# EAGLE board Lamp Logic Board_22 Power (EAGLE 9.5.1)
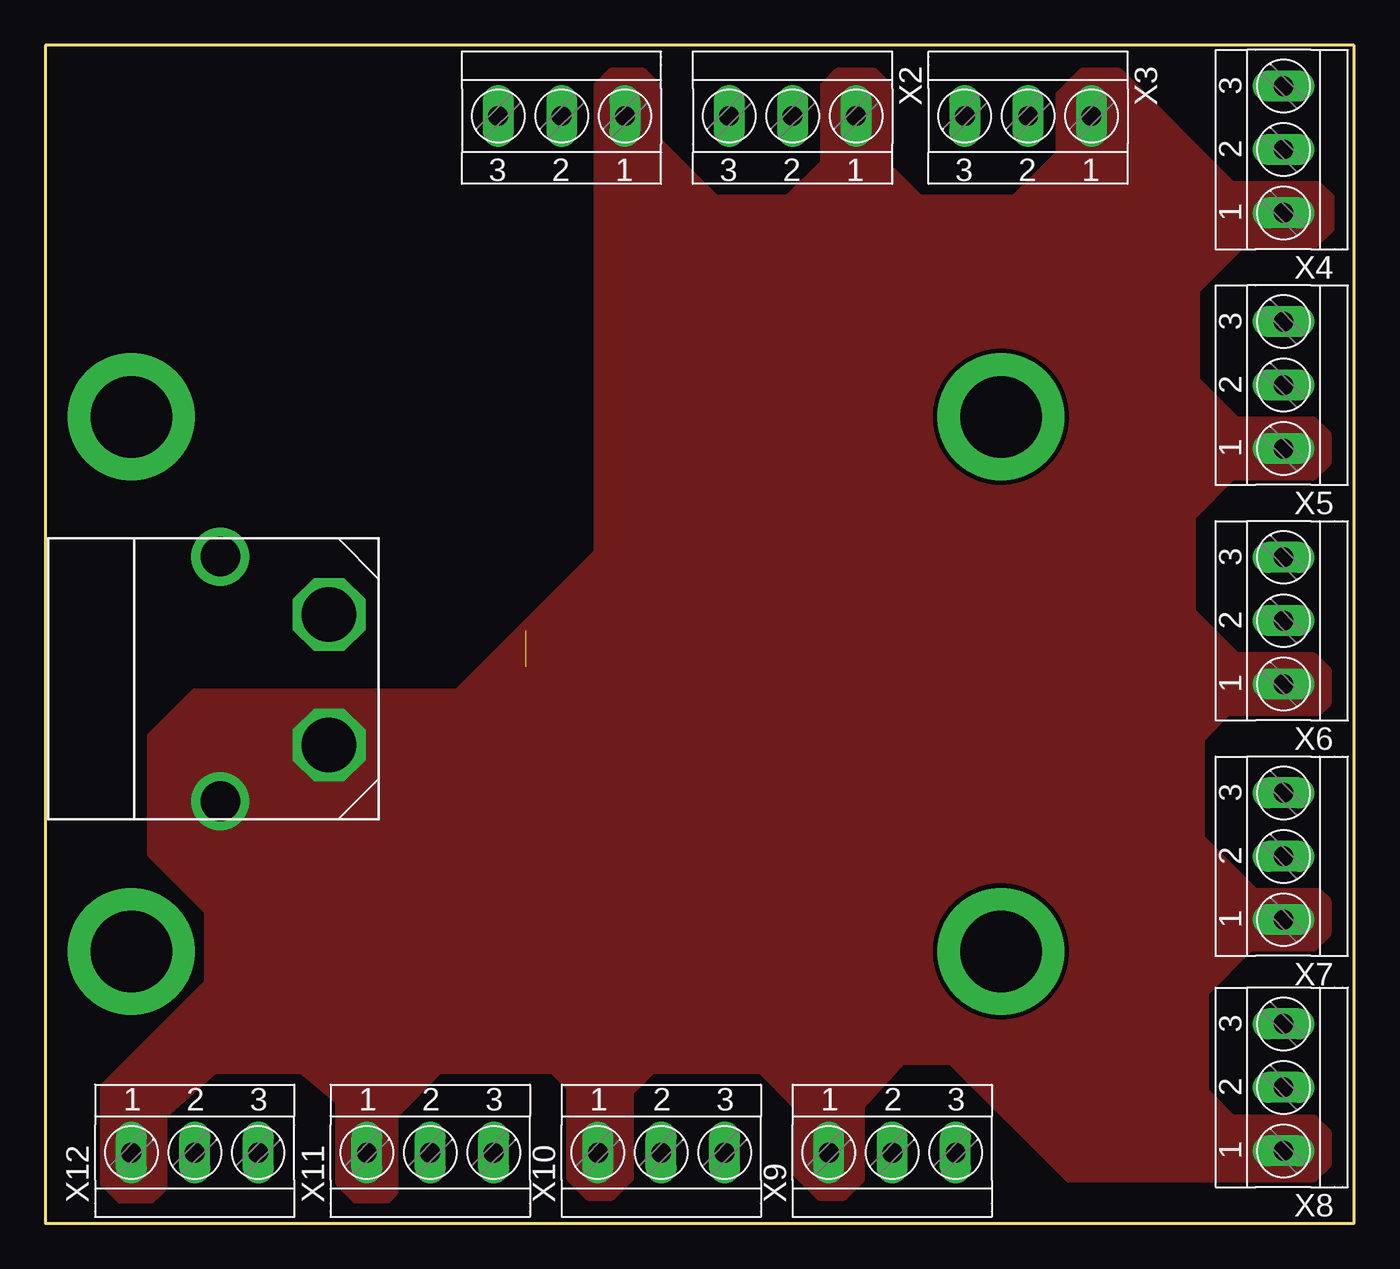
[diagram p0: board, top side]
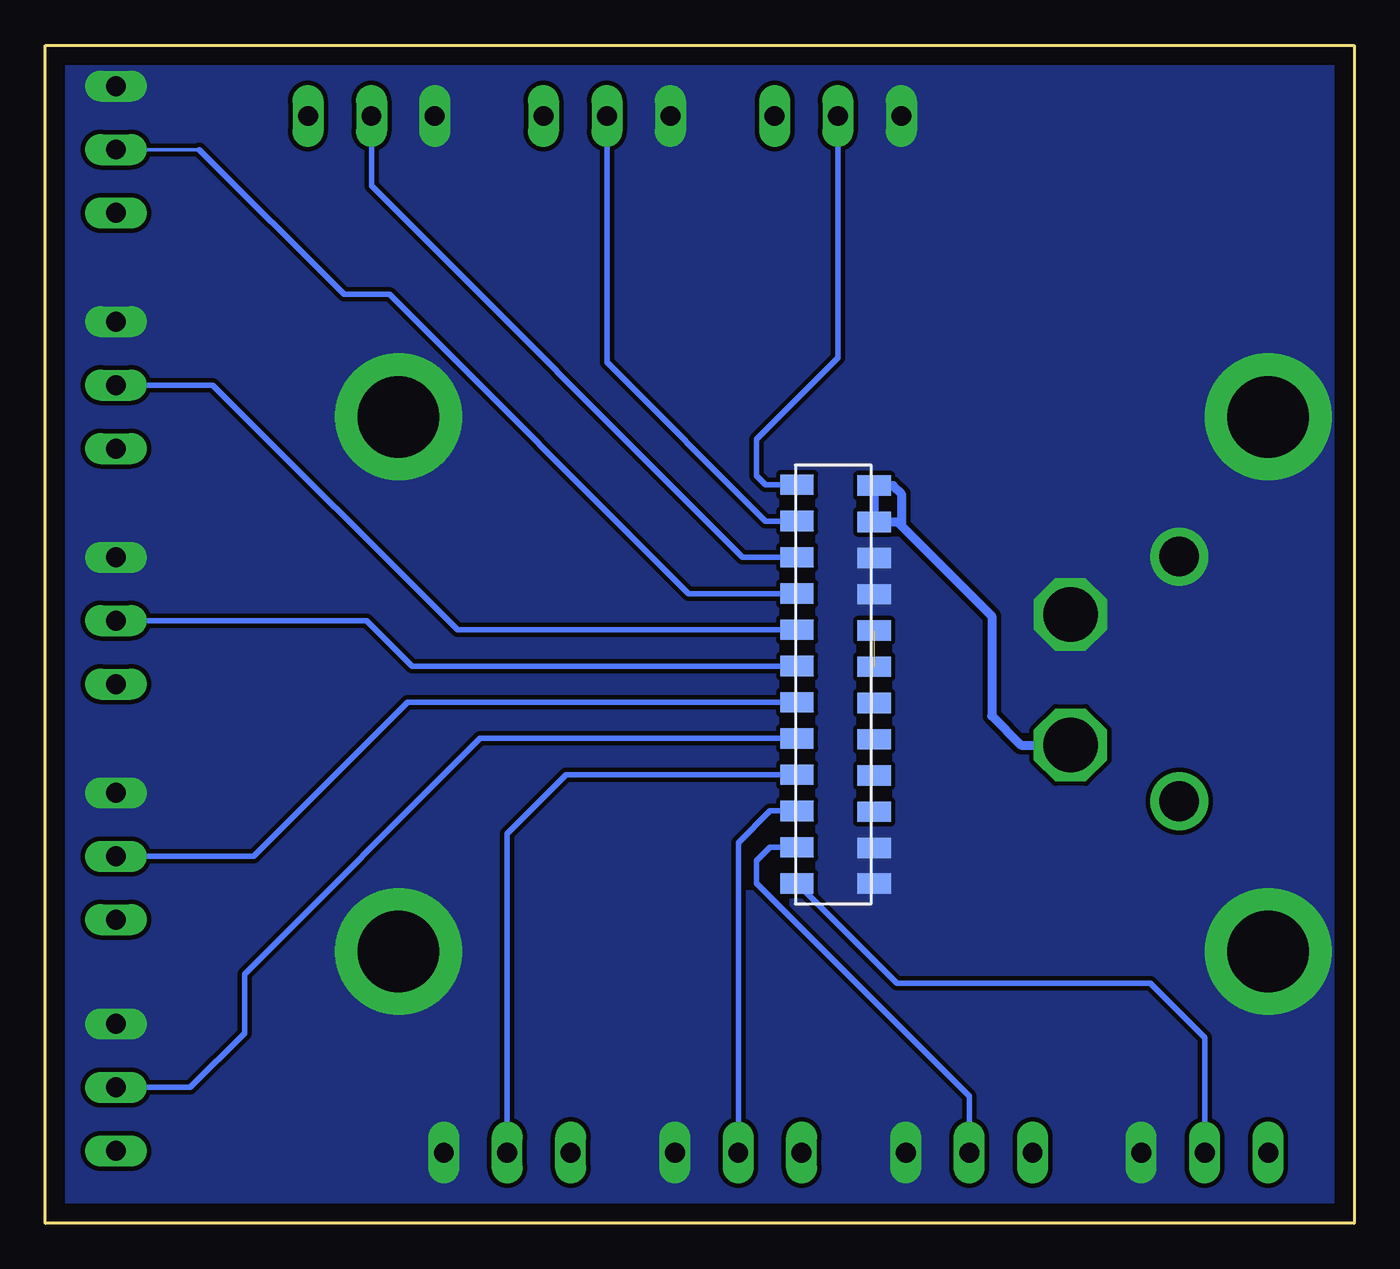
[diagram p1: board, bottom side, seen from below]

Size 72.25 x 65 mm. Coordinates in mm from the lower left corner, seen from the top.
Outline: 72.25,0 72.25,65 0,65 0,0 72.25,0
Copper layers (1*16): Top 0.035mm / dielectric 1.5mm / Bottom 0.035mm
Design rules "default": minimum track width 6mil, minimum drill 0.35mm, track to track 6mil, track to pad 6mil, pad to pad 6mil, via to via 6mil, smd to smd 6mil, copper to edge 40mil, drill to drill 6mil, minimum pad ring 10mil, minimum via ring 8mil, stop-mask expansion 4mil, vias tented up to drill 0mil, thermal gap 10mil

## Footprints (pad centres in the part's own frame; a part is rotated, then mirrored left to right if it is on the bottom)
4,PIECE = drill 4.5 pad 7: P$1 0,0; P$2 48,29.5; P$3 0,29.5; P$4 48,0
MY_HEADER = smd 1.12 x 1.83: P$1 -2,0; P$2 0.005,0; P$3 2.005,0; P$4 4.005,0; P$5 6.005,0; P$6 8.005,0; P$7 10.005,0; P$8 12.005,0; P$9 14.005,0; P$10 16.005,0; P$11 18.005,0; P$12 20.005,0; P$13 -2,-4.25; P$14 -0.045,-4.25; P$15 1.955,-4.25; P$16 3.955,-4.25; P$17 5.955,-4.25; P$18 7.955,-4.25; P$19 9.955,-4.25; P$20 11.955,-4.25; P$21 13.955,-4.25; P$22 15.955,-4.25; P$23 17.955,-4.25; P$24 19.955,-4.25
XT60 = drill 3 octagon: + 4.1,2.75; - 11.3,2.75 | drill 2.184 pad 2.438: +_HOLE 1,8.75 | drill 2.184 pad 2.413: -_HOLE 14.5,8.75
TERMINAL-BLOCK-3-PIN-3.5MM-LONG-PAD = drill 1.1 pad 1.7 long: 1 -3.5,-0.1; 2 0,-0.1; 3 3.5,-0.1

## Placement (x,y rotation side)
U$1  POWERBOARD_TEMPLATEPOWERBOARD_TEMPLATE  [4,PIECE]  4.75,15 0 top
U$2  MY_HEADER  [MY_HEADER]  30.75,20.75 90 bottom
U$3  XT60  [XT60]  18.41,22.29 90 top
X1  TERMINAL-BLOCK-3.5MM-3-PIN-LONG-PAD  [TERMINAL-BLOCK-3-PIN-3.5MM-LONG-PAD]  28.5,61 180 top
X2  TERMINAL-BLOCK-3.5MM-3-PIN-LONG-PAD  [TERMINAL-BLOCK-3-PIN-3.5MM-LONG-PAD]  41.25,61 180 top
X3  TERMINAL-BLOCK-3.5MM-3-PIN-LONG-PAD  [TERMINAL-BLOCK-3-PIN-3.5MM-LONG-PAD]  54.25,61 180 top
X4  TERMINAL-BLOCK-3.5MM-3-PIN-LONG-PAD  [TERMINAL-BLOCK-3-PIN-3.5MM-LONG-PAD]  68.25,59.25 90 top
X5  TERMINAL-BLOCK-3.5MM-3-PIN-LONG-PAD  [TERMINAL-BLOCK-3-PIN-3.5MM-LONG-PAD]  68.25,46.25 90 top
X6  TERMINAL-BLOCK-3.5MM-3-PIN-LONG-PAD  [TERMINAL-BLOCK-3-PIN-3.5MM-LONG-PAD]  68.25,33.25 90 top
X7  TERMINAL-BLOCK-3.5MM-3-PIN-LONG-PAD  [TERMINAL-BLOCK-3-PIN-3.5MM-LONG-PAD]  68.25,20.25 90 top
X8  TERMINAL-BLOCK-3.5MM-3-PIN-LONG-PAD  [TERMINAL-BLOCK-3-PIN-3.5MM-LONG-PAD]  68.25,7.5 90 top
X9  TERMINAL-BLOCK-3.5MM-3-PIN-LONG-PAD  [TERMINAL-BLOCK-3-PIN-3.5MM-LONG-PAD]  46.75,4 0 top
X10  TERMINAL-BLOCK-3.5MM-3-PIN-LONG-PAD  [TERMINAL-BLOCK-3-PIN-3.5MM-LONG-PAD]  34,4 0 top
X11  TERMINAL-BLOCK-3.5MM-3-PIN-LONG-PAD  [TERMINAL-BLOCK-3-PIN-3.5MM-LONG-PAD]  21.25,4 0 top
X12  TERMINAL-BLOCK-3.5MM-3-PIN-LONG-PAD  [TERMINAL-BLOCK-3-PIN-3.5MM-LONG-PAD]  8.25,4 0 top

## Library data of the parts
U$1 = QUICKFIT_RISER_THING
U$2 = MY_HEADER
U$3 = XT60
X1-X12 = Rembrandt Electronics - Terminal Block 3-5mm v1-0

## Nets
GND: U$1.P$1 U$1.P$2 U$1.P$3 U$1.P$4 U$2.P$13 U$2.P$14 U$2.P$21 U$2.P$22 U$3.- U$3.-_HOLE X1.3 X2.3 X3.3 X4.3 X5.3 X6.3 X7.3 X8.3 X9.3 X10.3 X11.3 X12.3
HEADER_CS: U$2.P$15
LEDS1_5V: U$2.P$12 X1.2
LEDS2_5V: U$2.P$11 X2.2
LEDS3_5V: U$2.P$10 X3.2
LEDS4_5V: U$2.P$9 X4.2
LEDS5_5V: U$2.P$8 X5.2
LEDS6_5V: U$2.P$7 X6.2
LEDS7_5V: U$2.P$6 X7.2
LEDS8_5V: U$2.P$5 X8.2
LEDS9_5V: U$2.P$4 X9.2
LEDS10_5V: U$2.P$3 X10.2
LEDS11_5V: U$2.P$2 X11.2
LEDS12_5V: U$2.P$1 X12.2
MISO: U$2.P$18
MOSI: U$2.P$17
SCK: U$2.P$16
VDD3V3: U$2.P$19 U$2.P$20
VDD5V: U$2.P$23 U$2.P$24 U$3.+ U$3.+_HOLE X1.1 X2.1 X3.1 X4.1 X5.1 X6.1 X7.1 X8.1 X9.1 X10.1 X11.1 X12.1

## Tracks (layer width: path | path; a pad name or v marks a point on that pad's centre or on a via)
GND
  pour Bottom (isolate 0.254, no thermals): -1,65.25 -1,-0.25 -1.25,-0.5 73,-0.5 73,65.5 -0.75,65.5
LEDS1_5V
  Bottom 0.203: U$2.P$12
  Bottom 0.305: X1.2 28.5,47.75 33,43.25 33,41.25 32.5,40.75 U$2.P$12
LEDS2_5V
  Bottom 0.203: U$2.P$11
  Bottom 0.305: X2.2 41.25,47.5 32.5,38.75 U$2.P$11
LEDS3_5V
  Bottom 0.305: X3.2 54.25,57.25 33.75,36.75 U$2.P$10
LEDS4_5V
  Bottom 0.203: X4.2 63.75,59.25 | U$2.P$9
  Bottom 0.305: U$2.P$9 36.75,34.75 53.25,51.25 55.75,51.25 63.75,59.25
LEDS5_5V
  Bottom 0.203: U$2.P$8
  Bottom 0.305: U$2.P$8 49.5,32.75 63,46.25 X5.2
LEDS6_5V
  Bottom 0.203: U$2.P$7
  Bottom 0.305: X6.2 54.5,33.25 52,30.75 U$2.P$7
LEDS7_5V
  Bottom 0.305: X7.2 60.75,20.25 52.24,28.76 U$2.P$6
LEDS8_5V
  Bottom 0.305: X8.2 64.25,7.5 61.25,10.5 61.25,13.75 48.24,26.76 U$2.P$5
LEDS9_5V
  Bottom 0.305: X9.2 46.75,21.5 43.49,24.76 U$2.P$4
LEDS10_5V
  Bottom 0.305: X10.2 34,21 32.25,22.75 U$2.P$3
LEDS11_5V
  Bottom 0.203: U$2.P$2 31.5,20.75 | 32.26,20.74 32.25,20.74 32.26,20.74
  Bottom 0.305: 32.25,20.74 31.5,20.75 | X11.2 21.25,7 33,18.75 33,20 32.26,20.74
LEDS12_5V
  Bottom 0.305: U$2.P$1 25.25,13.25 11.25,13.25 8.25,10.25 X12.2
VDD3V3  (1 unrouted)
VDD5V
  Bottom 0.508: 25,38.5 25.2,38.7 U$2.P$23 U$2.P$24 25.45,40.7 25,40.25 25,38.5 | 25,38.5 20,33.5 20,28 18.39,26.39 U$3.+
  pour Top (isolate 0.254, no thermals): 8.25,29.25 5.86,26.86 5.86,20.39 9,17.25 9,13.25 3.25,7.5 3.25,4.75 3.25,2.25 4.5,1 5.5,1 6.5,2 6.5,6 9.31,8.5 14.15,8.5 16.25,6.75 16.25,2.25 17.5,1 18.5,1 19.25,1.75 19.25,6 21.75,8.5 28,8.5 29,7.5 29,2.5 30,1.5 31.25,1.5 32.25,2.5 32.25,7.25 33.5,8.5 39.5,8.5 41.5,6.5 41.5,2.75 42.75,1.5 44.07,1.5 45,2.43 45,6.47 47.28,9 50,9 56.5,2.5 70,2.5 70.75,3.25 70.75,5 70,5.75 65.5,5.75 64,7.25 64,12.75 66.5,15.25 70,15.25 70.75,16 70.75,16.5 70.75,17.75 70.25,18.25 66.75,18.25 63.75,21.25 63.75,26.75 65.25,28.25 70.25,28.25 70.75,28.75 70.75,30.5 70,31.25 65.75,31.25 63.25,33.75 63.25,39 65.5,41.25 70,41.25 70.75,42 70.75,43.5 70,44.25 65.75,44.25 63.5,46.5 63.5,51.5 66,54 70,54 71,55 71,56.5 70.25,57.25 65.5,57.25 59.25,63.5 57.25,63.5 56,62.25 56,59 53.5,56.5 48.25,56.5 46.5,58.25 46.5,62.75 45.75,63.5 43.75,63.5 43,62.75 43,58.5 41,56.5 37,56.5 33.75,59.75 33.75,62.75 33,63.5 31.25,63.5 30.5,62.75 30.5,37 22.75,29.25
(copper drawn outside any net)
  shapes: Top area x1